# EAGLE board component (EAGLE 7.2.0)
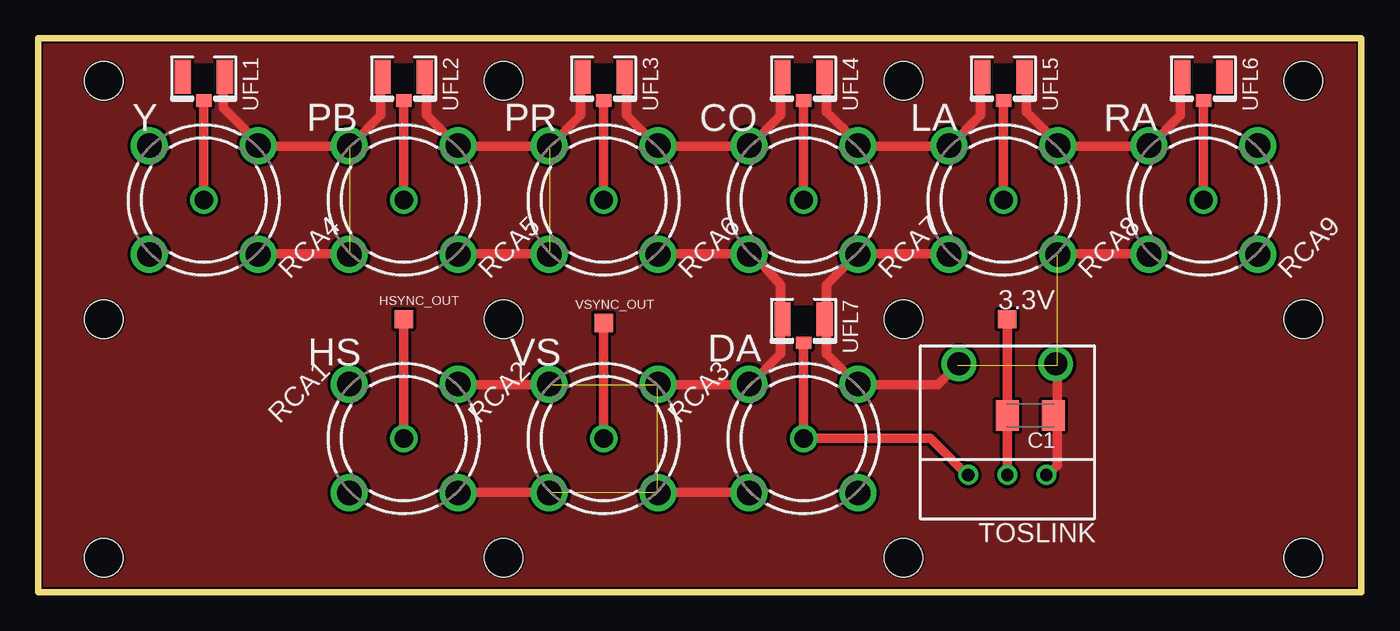
[diagram p0: board, top side]

Size 86 x 36 mm. Coordinates in mm from the lower left corner, seen from the top.
Outline: 86,36 86,0 0,0 0,36 86,36
Copper layers (1*16): Top 0.035mm / dielectric 1.5mm / Bottom 0.035mm
Design rules "default *": minimum track width 10mil, minimum drill 24mil, track to track 8mil, track to pad 8mil, pad to pad 8mil, via to via 8mil, smd to smd 8mil, copper to edge 5mil, drill to drill 8mil, minimum pad ring 10mil, minimum via ring 8mil, stop-mask expansion 4mil, vias tented up to drill 0mil, thermal gap 10mil
Holes 2.5 mm at 4.25,17.75 4.25,2.25 82.25,2.25 30.25,2.25 56.25,17.75 56.25,2.25 82.25,17.75 82.25,33.25 4.25,33.25 56.25,33.25 30.25,17.75 30.25,33.25

## Footprints (pad centres in the part's own frame; a part is rotated, then mirrored left to right if it is on the bottom)
TP12SQ = smd 1.2 x 1.2: TP 0,0
C1206K = smd 1.5 x 2: 1 -1.5,0; 2 1.5,0
BTOR1 = drill 1.6 pad 2.2: S -5,0; S@1 0,5; S@2 5,0; S@3 0,-5 | drill 1.2 pad 1.6: T 0,0
PLT133/T9 = drill 0.8 pad 1.27: 1 2.54,7.62; 2 0,7.62; 3 -2.54,7.62 | drill 1.5: P$2 -3.15,0.4; P$3 3.15,0.4
U.FL = smd 2.2 x 1.05: 1 0,1.375; 2 0,-1.375 | smd 0.8 x 1: 3 1.525,0

## Placement (x,y rotation side)
3.3V  [TP12SQ]  63,17.75 0 top
C1  1uf  [C1206K]  64.5,11.5 180 top
HSYNC_OUT  [TP12SQ]  23.75,17.75 0 top
RCA1  [BTOR1]  23.75,10 45 top
RCA2  [BTOR1]  36.75,10 45 top
RCA3  [BTOR1]  49.75,10 45 top
RCA4  [BTOR1]  10.75,25.5 225 top
RCA5  [BTOR1]  23.75,25.5 225 top
RCA6  [BTOR1]  36.75,25.5 225 top
RCA7  [BTOR1]  49.75,25.5 225 top
RCA8  [BTOR1]  62.75,25.5 225 top
RCA9  [BTOR1]  75.75,25.5 225 top
TOSLINK  [PLT133/T9]  63,15.25 180 top
UFL1  [U.FL]  10.75,33.5 270 top
UFL2  [U.FL]  23.75,33.5 270 top
UFL3  [U.FL]  36.75,33.5 270 top
UFL4  [U.FL]  49.75,33.5 270 top
UFL5  [U.FL]  62.75,33.5 270 top
UFL6  [U.FL]  75.75,33.5 270 top
UFL7  [U.FL]  49.75,17.75 270 top
VSYNC_OUT  [TP12SQ]  36.75,17.5 0 top

## Library data of the parts
3.3V HSYNC_OUT VSYNC_OUT = testpad1
C1 = resistor
RCA1-RCA9 = con-lumberg
TOSLINK = optocoupler1
UFL1-UFL7 = adafruit

## Nets
S$1: RCA1.T
S$3: RCA9.T
S$4: RCA8.T
S$6: RCA2.T

## Tracks (layer width: path | path; a pad name or v marks a point on that pad's centre or on a via)
GROUND  (7 unrouted)
  Top 0.61: 14.25,29 20.25,29 22.25,31 22.25,33.25 | 53.25,29 59.25,29 61.25,31 61.25,33.5 | 66.5,29 72.25,29 74.25,31 74.25,33.5 | 66.5,29 66.25,29 | 20.25,22 14.25,22 | 33.25,22 27.25,22 | 59.25,22 53.25,22 51.25,20 51.25,15.5 53.25,13.5 58.5,13.5 59.75,14.75 | 72.25,22 66.25,22 | 25,33.25 25.25,33.25 25.25,31 27.25,29 33.25,29 35.25,31 35.25,33.25 | 65.5,7.5 66.25,8.25 66.25,14.75 | 48.25,18.5 48.25,20 46.5,22 40.25,22 | 48.25,33.25 48.25,31 46.25,29 40.25,29 38.25,31 38.25,33.25 | 53.25,29.25 51.25,31.25 51.25,33.5 | 27.25,13.5 33.25,13.5 | 40.25,13.5 46.25,13.5 48.25,15.5 48.25,17.75 | 40.25,6.5 46.25,6.5 | 27.25,6.5 33.25,6.5 | 12,33.25 12,31.5 14.25,29.25 | 66.5,29 64.25,31.25 64.25,33.5
  pour Top: 0,36 0,0 86,0 86,36
S$1
  Top 0.61: 23.75,17.75 RCA1.T
S$3
  Top 0.61: 75.75,32 RCA9.T
S$4
  Top 0.61: 62.75,31.75 RCA8.T
S$5
  Top 0.61: 49.75,31.75 49.75,25.5
S$6
  Top 0.61: 36.75,17.5 RCA2.T
S$7
  Top 0.61: 49.75,16.25 49.75,10 58,10 60.5,7.5
S$10
  Top 0.61: 36.75,31.75 36.75,25.5
S$11
  Top 0.61: 23.75,31.75 23.75,25.5
S$12
  Top 0.61: 10.75,31.75 10.75,25.5
VCC
  Top 0.61: 63,7.5 63,17.5

## Text on the board
tNames: Y | PB | PR | CO | LA | RA | HS | VS | DA